# Altium PCB PCB2.PcbDoc (part 5 of 5)
Units mil, origin at the board's own origin, x right, y up, seen from the top; angles counter-clockwise.
Board outline 6000 x 4000 mil, 2 copper layers (Top Layer, Bottom Layer); 109 components, 117 nets, 490 pads, 96 vias.
Unrouted connection lines stored in the file: 3.
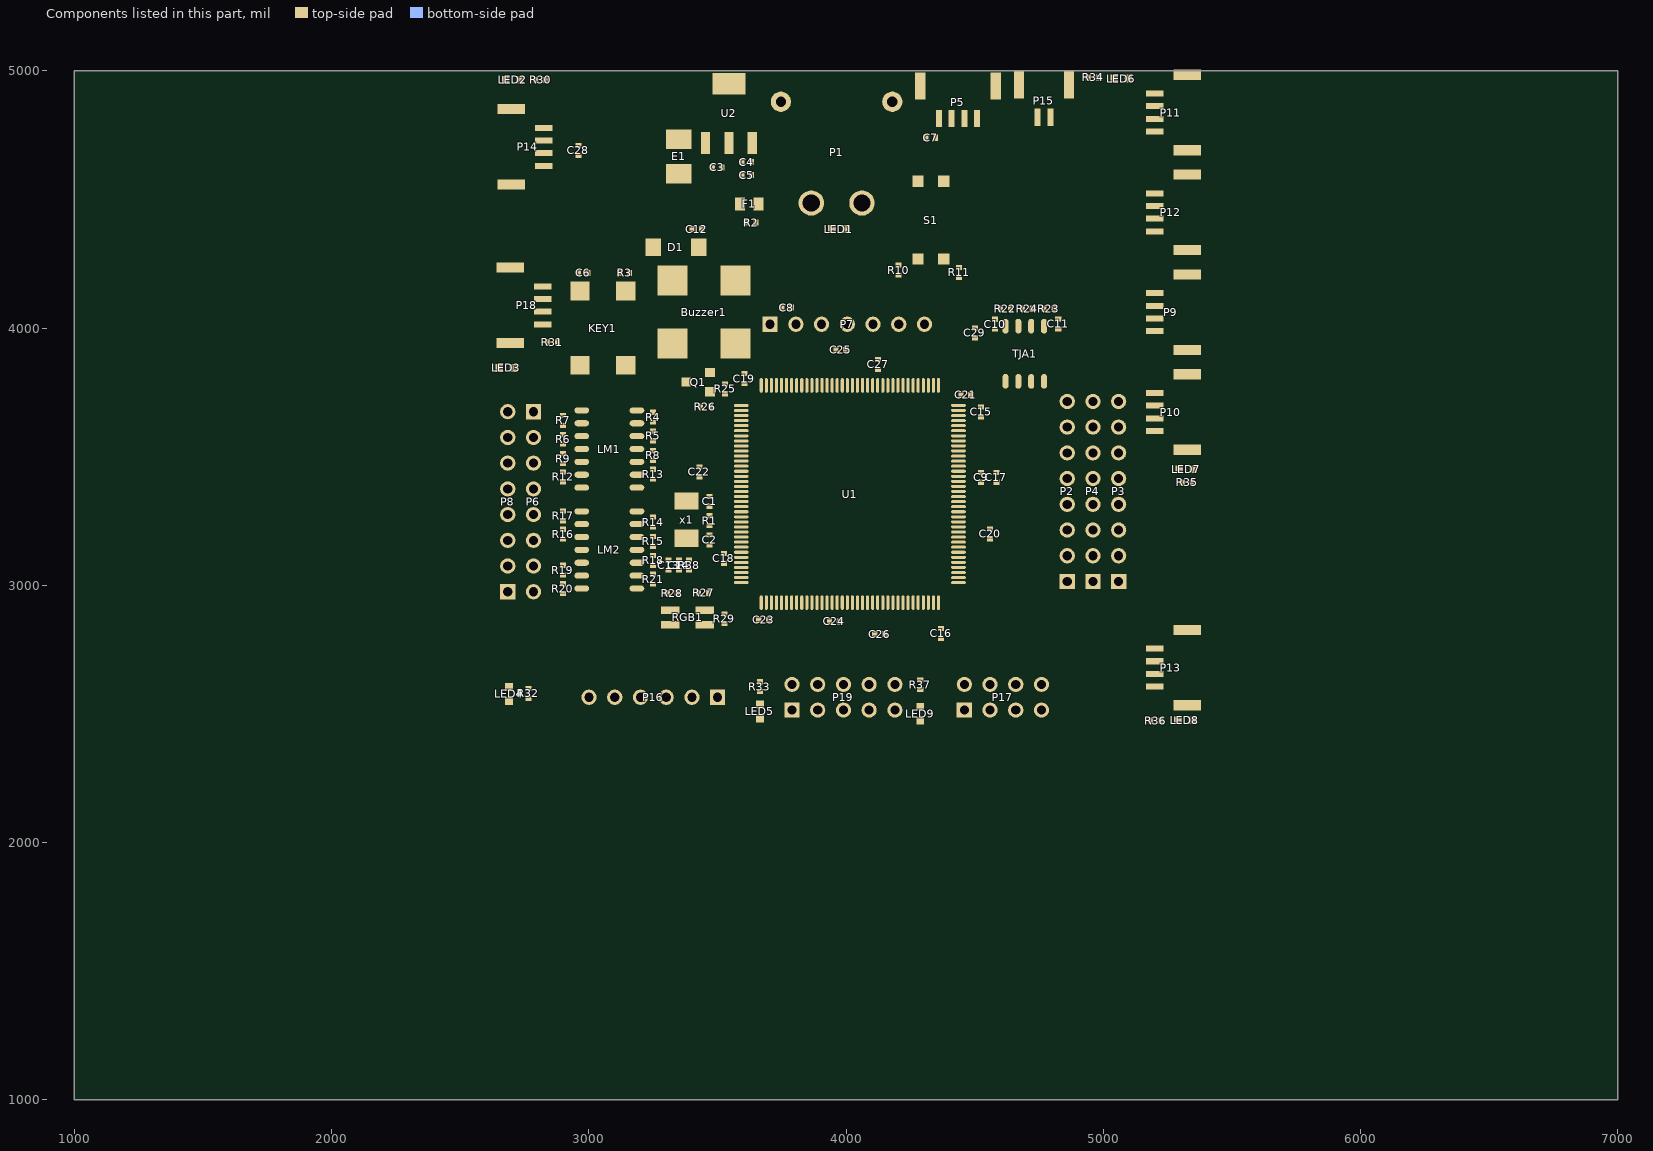
[diagram p5: the components of this part, seen from the top]

## Via types
v1: diameter 19.68, hole 11.81, Top Layer to Bottom Layer, tented both sides, 64 vias
v2: diameter 39, hole 30, Top Layer to Bottom Layer, tented both sides, 17 vias
v3: diameter 30, hole 20, Top Layer to Bottom Layer, tented both sides, 15 vias

## Nets (pads, with @x,y where several pads share a name; then routed paths per layer and width w, separated by ;. In a path a pad name is that pad's centre, name@x,y a point inside that pad or via, vN(x,y) a via of type N, cw(c..) or ccw(c..) an arc to the next point about the centre after c; other vN are vias at no path point) (continued)
copper on no net: (continued)
  Top Layer w1: 4407.33,2111 4493.67,2111 ; 4407.33,2112 4493.67,2112 ; 4407.33,2113 4493.67,2113 ; 4407.33,2114 4493.67,2114 ; 4407.33,2115 4493.67,2115 ; 4407.33,2116 4493.67,2116 ; 4407.33,2117 4492.67,2117 ; 4407.33,2118 4492.67,2118 ; 4408.33,2097 4495.67,2097 ; 4408.33,2098 4495.67,2098 ; 4408.33,2099 4494.67,2099 ; 4408.33,2100 4494.67,2100 ; 4408.33,2101 4494.67,2101 ; 4408.33,2102 4494.67,2102 ; 4408.33,2103 4494.67,2103 ; 4408.33,2104 4494.67,2104 ; 4408.33,2105 4494.67,2105 ; 4408.33,2106 4494.67,2106 ; 4408.33,2107 4494.67,2107 ; 4408.33,2108 4494.67,2108 ; 4408.33,2109 4494.67,2109 ; 4408.33,2272 4510.67,2272 ; 4409.33,1930 4423.67,1930 ; 4409.33,1931 4423.67,1931 ; 4409.33,1932 4423.67,1932 ; 4409.33,1933 4423.67,1933 ; 4409.33,1934 4423.67,1934 ; 4409.33,1935 4423.67,1935 ; 4409.33,1936 4423.67,1936 ; 4409.33,1937 4423.67,1937 ; 4409.33,1938 4423.67,1938 ; 4409.33,1939 4423.67,1939 ; 4409.33,1940 4423.67,1940 ; 4409.33,1941 4423.67,1941 ; 4409.33,1942 4423.67,1942 ; 4409.33,1943 4423.67,1943 ; 4409.33,1944 4423.67,1944 ; 4409.33,1945 4423.67,1945 ; 4409.33,1946 4423.67,1946 ; 4409.33,1947 4423.67,1947 ; 4409.33,1948 4423.67,1948 ; 4409.33,1949 4423.67,1949 ; 4409.33,1950 4423.67,1950 ; 4409.33,1951 4423.67,1951 ; 4409.33,1952 4423.67,1952 ; 4409.33,1953 4423.67,1953 ; 4409.33,1954 4423.67,1954 ; 4409.33,1955 4423.67,1955 ; 4409.33,1956 4423.67,1956 ; 4409.33,1957 4423.67,1957 ; 4409.33,1958 4423.67,1958 ; 4409.33,1959 4423.67,1959 ; 4409.33,1960 4423.67,1960 ; 4409.33,1961 4423.67,1961 ; 4409.33,1962 4447.67,1962 ; 4409.33,1963 4448.67,1963 ; 4409.33,1964 4448.67,1964 ; 4409.33,1965 4449.67,1965 ; 4409.33,1966 4449.67,1966 ; 4409.33,1967 4449.67,1967 ; 4409.33,1968 4423.67,1968 ; 4409.33,1969 4423.67,1969 ; 4409.33,1970 4423.67,1970 ; 4409.33,1971 4423.67,1971 ; 4409.33,1972 4423.67,1972 ; 4409.33,1973 4423.67,1973 ; 4409.33,1974 4423.67,1974 ; 4409.33,1975 4423.67,1975 ; 4409.33,1976 4423.67,1976 ; 4409.33,1977 4423.67,1977 ; 4409.33,1978 4423.67,1978 ; 4409.33,1979 4423.67,1979 ; 4409.33,1980 4423.67,1980 ; 4409.33,1981 4423.67,1981 ; 4409.33,1982 4423.67,1982 ; 4409.33,1983 4423.67,1983 ; 4409.33,1984 4423.67,1984 ; 4409.33,1985 4423.67,1985 ; 4409.33,1986 4423.67,1986 ; 4409.33,1987 4423.67,1987 ; 4409.33,1988 4423.67,1988 ; 4409.33,1989 4423.67,1989 ; 4409.33,1990 4423.67,1990 ; 4409.33,1991 4423.67,1991 ; 4409.33,1992 4423.67,1992 ; 4409.33,1993 4423.67,1993 ; 4409.33,1994 4423.67,1994 ; 4409.33,1995 4423.67,1995 ; 4409.33,1996 4423.67,1996 ; 4409.33,1997 4423.67,1997 ; 4409.33,1998 4423.67,1998 ; 4409.33,1999 4423.67,1999 ; 4409.33,2000 4423.67,2000 ; 4409.33,2001 4423.67,2001 ; 4409.33,2002 4423.67,2002 ; 4409.33,2003 4423.67,2003 ; 4409.33,2004 4423.67,2004 ; 4409.33,2005 4423.67,2005 ; 4409.33,2006 4423.67,2006 ; 4409.33,2007 4423.67,2007 ; 4409.33,2008 4423.67,2008 ; 4409.33,2009 4423.67,2009 ; 4409.33,2010 4423.67,2010 ; 4409.33,2011 4423.67,2011 ; 4409.33,2012 4423.67,2012 ; 4409.33,2013 4423.67,2013 ; 4409.33,2014 4423.67,2014 ; 4409.33,2015 4423.67,2015 ; 4409.33,2016 4423.67,2016 ; 4409.33,2017 4423.67,2017 ; 4409.33,2018 4423.67,2018 ; 4409.33,2019 4423.67,2019 ; 4409.33,2020 4423.67,2020 ; 4409.33,2021 4451.67,2021 ; 4409.33,2022 4453.67,2022 ; 4409.33,2023 4454.67,2023 ; 4409.33,2024 4455.67,2024 ; 4409.33,2025 4454.67,2025 ; 4409.33,2026 4453.67,2026 ; 4409.33,2027 4452.67,2027 ; 4409.33,2028 4451.67,2028 ; 4409.33,2029 4449.67,2029 ; 4409.33,2030 4448.67,2030 ; 4409.33,2031 4423.67,2031 ; 4409.33,2032 4423.67,2032 ; 4409.33,2033 4423.67,2033 ; 4409.33,2079 4494.67,2079 ; 4409.33,2080 4495.67,2080 ; 4409.33,2081 4495.67,2081 ; 4409.33,2082 4495.67,2082 ; 4409.33,2083 4495.67,2083 ; 4409.33,2084 4495.67,2084 ; 4409.33,2085 4495.67,2085 ; 4409.33,2086 4495.67,2086 ; 4409.33,2087 4495.67,2087 ; 4409.33,2088 4495.67,2088 ; 4409.33,2089 4495.67,2089 ; 4409.33,2090 4495.67,2090 ; 4409.33,2091 4495.67,2091 ; 4409.33,2092 4495.67,2092 ; 4409.33,2093 4495.67,2093 ; 4409.33,2094 4495.67,2094 ; 4409.33,2095 4495.67,2095 ; 4409.33,2096 4495.67,2096 ; 4409.33,2271 4510.67,2271 ; 4410.33,2064 4492.67,2064 ; 4410.33,2065 4492.67,2065 ; 4410.33,2066 4493.67,2066 ; 4410.33,2067 4493.67,2067 ; 4410.33,2068 4493.67,2068 ; 4410.33,2069 4493.67,2069 ; 4410.33,2070 4493.67,2070 ; 4410.33,2071 4494.67,2071 ; 4410.33,2072 4494.67,2072 ; 4410.33,2073 4494.67,2073 ; 4410.33,2074 4494.67,2074 ; 4410.33,2075 4494.67,2075 ; 4410.33,2076 4494.67,2076 ; 4410.33,2077 4494.67,2077 ; 4410.33,2078 4494.67,2078 ; 4411.33,2063 4491.67,2063 ; 4411.33,2270 4511.67,2270 ; 4412.33,2269 4511.67,2269 ; 4413.33,2268 4512.67,2268 ; 4414.33,2267 4512.67,2267 ; 4415.33,2266 4513.67,2266 ; 4416.33,2264 4514.67,2264 ; 4416.33,2265 4513.67,2265 ; 4417.33,2263 4514.67,2263 ; 4418.33,2261 4515.67,2261 ; 4418.33,2262 4515.67,2262 ; 4419.33,2260 4516.67,2260 ; 4420.33,2258 4516.67,2258 ; 4420.33,2259 4516.67,2259 ; 4421.33,2255 4517.67,2255 ; 4421.33,2256 4517.67,2256 ; 4421.33,2257 4517.67,2257 ; 4422.33,2253 4518.67,2253 ; 4422.33,2254 4518.67,2254 ; 4423.33,2251 4519.67,2251 ; 4423.33,2252 4519.67,2252 ; 4424.33,2249 4520.67,2249 ; 4424.33,2250 4519.67,2250 ; 4425.33,1961 4447.67,1961 ; 4425.33,2246 4521.67,2246 ; 4425.33,2247 4520.67,2247 ; 4425.33,2248 4520.67,2248 ; 4426.33,2242 4522.67,2242 ; 4426.33,2243 4522.67,2243 ; 4426.33,2244 4521.67,2244 ; 4426.33,2245 4521.67,2245 ; 4427.33,2237 4523.67,2237 ; 4427.33,2238 4523.67,2238 ; 4427.33,2239 4523.67,2239 ; 4427.33,2240 4523.67,2240 ; 4427.33,2241 4522.67,2241 ; 4428.33,1960 4446.67,1960 ; 4428.33,1995 4439.67,1995 ; 4428.33,1996 4438.67,1996 ; 4428.33,1997 4437.67,1997 ; 4428.33,1998 4437.67,1998 ; 4428.33,1999 4438.67,1999 ; 4428.33,2223 4526.67,2223 ; 4428.33,2229 4525.67,2229 ; 4428.33,2230 4525.67,2230 ; 4428.33,2231 4525.67,2231 ; 4428.33,2232 4525.67,2232 ; 4428.33,2233 4524.67,2233 ; 4428.33,2234 4524.67,2234 ; 4428.33,2235 4524.67,2235 ; 4428.33,2236 4524.67,2236 ; 4429.33,1968 4449.67,1968 ; 4429.33,1994 4440.67,1994 ; 4429.33,2000 4438.67,2000 ; 4429.33,2001 4439.67,2001 ; 4429.33,2002 4439.67,2002 ; 4429.33,2003 4440.67,2003 ; 4429.33,2224 4526.67,2224 ; 4429.33,2225 4526.67,2225 ; 4429.33,2226 4526.67,2226 ; 4429.33,2227 4526.67,2227 ; 4429.33,2228 4525.67,2228 ; 4430.33,1959 4445.67,1959 ; 4430.33,1992 4442.67,1992 ; 4430.33,1993 4441.67,1993 ; 4430.33,2004 4440.67,2004 ; 4430.33,2005 4441.67,2005 ; 4430.33,2006 4441.67,2006 ; 4430.33,2007 4442.67,2007 ; 4431.33,1957 4443.67,1957 ; 4431.33,1958 4444.67,1958 ; 4431.33,1990 4444.67,1990 ; 4431.33,1991 4443.67,1991 ; 4431.33,2008 4442.67,2008 ; 4431.33,2009 4443.67,2009 ; 4431.33,2010 4443.67,2010 ; 4431.33,2011 4444.67,2011 ; 4432.33,1955 4438.67,1955 ; 4432.33,1956 4441.67,1956 ; 4432.33,1989 4445.67,1989 ; 4432.33,2012 4444.67,2012 ; 4432.33,2013 4445.67,2013 ; 4432.33,2014 4446.67,2014 ; 4433.33,1954 4433.67,1954 ; 4433.33,1986 4447.67,1986 ; 4433.33,1987 4446.67,1987 ; 4433.33,1988 4446.67,1988 ; 4433.33,2015 4446.67,2015 ; 4433.33,2016 4447.67,2016 ; 4433.33,2017 4447.67,2017 ; 4433.33,2018 4448.67,2018 ; 4434.33,1969 4450.67,1969 ; 4434.33,1984 4448.67,1984 ; 4434.33,1985 4447.67,1985 ; 4434.33,2019 4449.67,2019 ; 4434.33,2020 4450.67,2020 ; 4435.33,1970 4450.67,1970 ; 4435.33,1981 4449.67,1981 ; 4435.33,1982 4449.67,1982 ; 4435.33,1983 4448.67,1983 ; 4436.33,1934 4448.67,1934 ; 4436.33,1935 4449.67,1935 ; 4436.33,1936 4451.67,1936 ; 4436.33,1971 4450.67,1971 ; 4436.33,1972 4450.67,1972 ; 4436.33,1973 4450.67,1973 ; 4436.33,1974 4450.67,1974 ; 4436.33,1975 4450.67,1975 ; 4436.33,1976 4450.67,1976 ; 4436.33,1977 4450.67,1977 ; 4436.33,1978 4450.67,1978 ; 4436.33,1979 4449.67,1979 ; 4436.33,1980 4449.67,1980 ; 4436.33,2031 4446.67,2031 ; 4437.33,1933 4447.67,1933 ; 4437.33,1937 4452.67,1937 ; 4437.33,2032 4445.67,2032 ; 4438.33,1932 4445.67,1932 ; 4438.33,1938 4453.67,1938 ; 4438.33,2033 4443.67,2033 ; 4438.33,2034 4442.67,2034 ; 4439.33,1931 4444.67,1931 ; 4439.33,1939 4454.67,1939 ; 4439.33,2035 4440.67,2035 ; 4440.33,1930 4442.67,1930 ; 4440.33,1940 4455.67,1940 ; 4441.33,1929 4441.67,1929 ; 4441.33,1941 4456.67,1941 ; 4442.33,1942 4458.67,1942 ; 4443.33,1943 4459.67,1943 ; 4444.33,1944 4460.67,1944 ; 4445.33,1945 4461.67,1945 ; 4445.33,1946 4461.67,1946 ; 4446.33,1947 4462.67,1947 ; 4447.33,1948 4463.67,1948 ; 4448.33,1949 4464.67,1949 ; 4448.33,1950 4465.67,1950 ; 4449.33,1951 4466.67,1951 ; 4450.33,1952 4466.67,1952 ; 4450.33,1953 4467.67,1953 ; 4451.33,1954 4468.67,1954 ; 4452.33,1955 4469.67,1955 ; 4452.33,1956 4469.67,1956 ; 4453.33,1957 4470.67,1957 ; 4454.33,1958 4470.67,1958 ; 4454.33,1959 4471.67,1959 ; 4455.33,1960 4472.67,1960 ; 4455.33,1961 4472.67,1961 ; 4456.33,1962 4473.67,1962 ; 4456.33,1963 4473.67,1963 ; 4457.33,1964 4473.67,1964 ; 4457.33,1965 4474.67,1965 ; 4458.33,1966 4474.67,1966 ; 4458.33,1967 4491.67,1967 ; 4459.33,1968 4491.67,1968 ; 4459.33,1969 4490.67,1969 ; 4459.33,1970 4489.67,1970 ; 4460.33,1971 4489.67,1971 ; 4460.33,1972 4488.67,1972 ; 4461.33,1973 4488.67,1973 ; 4461.33,1974 4487.67,1974 ; 4461.33,1975 4486.67,1975 ; 4461.33,1976 4486.67,1976 ; 4462.33,1977 4485.67,1977 ; 4462.33,1978 4485.67,1978 ; 4462.33,1979 4484.67,1979 ; 4463.33,1980 4484.67,1980 ; 4463.33,1981 4483.67,1981 ; 4463.33,1982 4483.67,1982 ; 4463.33,1983 4483.67,1983 ; 4463.33,1984 4482.67,1984 ; 4464.33,1985 4482.67,1985 ; 4464.33,1986 4481.67,1986 ; 4464.33,1987 4481.67,1987 ; 4464.33,1988 4481.67,1988 ; 4464.33,1989 4480.67,1989 ; 4464.33,1990 4480.67,1990 ; 4464.33,1991 4480.67,1991 ; 4465.33,1992 4480.67,1992 ; 4465.33,1993 4480.67,1993 ; 4465.33,1994 4480.67,1994 ; 4465.33,1995 4480.67,1995 ; 4465.33,1996 4480.67,1996 ; 4465.33,1997 4480.67,1997 ; 4465.33,1998 4480.67,1998 ; 4465.33,1999 4480.67,1999 ; 4465.33,2000 4480.67,2000 ; 4465.33,2001 4480.67,2001 ; 4465.33,2002 4480.67,2002 ; 4465.33,2003 4480.67,2003 ; 4465.33,2004 4480.67,2004 ; 4465.33,2005 4480.67,2005 ; 4465.33,2006 4480.67,2006 ; 4465.33,2007 4480.67,2007 ; 4465.33,2008 4480.67,2008 ; 4465.33,2009 4480.67,2009 ; 4465.33,2010 4480.67,2010 ; 4465.33,2011 4480.67,2011 ; 4465.33,2012 4480.67,2012 ; 4465.33,2013 4480.67,2013 ; 4465.33,2014 4480.67,2014 ; 4465.33,2015 4480.67,2015 ; 4465.33,2016 4480.67,2016 ; 4465.33,2017 4480.67,2017 ; 4465.33,2018 4480.67,2018 ; 4465.33,2019 4480.67,2019 ; 4465.33,2020 4480.67,2020 ; 4465.33,2021 4480.67,2021 ; 4465.33,2022 4480.67,2022 ; 4465.33,2023 4480.67,2023 ; 4465.33,2024 4480.67,2024 ; 4465.33,2025 4480.67,2025 ; 4465.33,2026 4480.67,2026 ; 4465.33,2027 4480.67,2027 ; 4465.33,2028 4480.67,2028 ; 4465.33,2029 4480.67,2029 ; 4465.33,2030 4480.67,2030 ; 4465.33,2031 4480.67,2031 ; 4465.33,2032 4480.67,2032 ; 4465.33,2033 4480.67,2033 ; 4465.33,2034 4480.67,2034 ; 4465.33,2035 4480.67,2035 ; 4476.33,1966 4492.67,1966 ; 4477.33,1963 4494.67,1963 ; 4477.33,1964 4493.67,1964 ; 4477.33,1965 4493.67,1965 ; 4478.33,1961 4496.67,1961 ; 4478.33,1962 4495.67,1962 ; 4479.33,1958 4498.67,1958 ; 4479.33,1959 4497.67,1959 ; 4479.33,1960 4496.67,1960 ; 4480.33,1956 4500.67,1956 ; 4480.33,1957 4499.67,1957 ; 4481.33,1954 4502.67,1954 ; 4481.33,1955 4501.67,1955 ; 4482.33,1952 4504.67,1952 ; 4482.33,1953 4503.67,1953 ; 4483.33,1950 4506.67,1950 ; 4483.33,1951 4505.67,1951 ; 4484.33,1948 4508.67,1948 ; 4484.33,1949 4507.67,1949 ; 4485.33,1946 4511.67,1946 ; 4485.33,1947 4510.67,1947 ; 4486.33,1944 4509.67,1944 ; 4486.33,1945 4510.67,1945 ; 4487.33,1943 4508.67,1943 ; 4488.33,1941 4505.67,1941 ; 4488.33,1942 4507.67,1942 ; 4489.33,1939 4503.67,1939 ; 4489.33,1940 4504.67,1940 ; 4490.33,1938 4502.67,1938 ; 4491.33,1937 4501.67,1937 ; 4492.33,1935 4500.67,1935 ; 4492.33,1936 4500.67,1936 ; 4493.33,1934 4499.67,1934 ; 4494.33,1933 4498.67,1933 ; 4495.33,1931 4496.67,1931 ; 4495.33,1932 4497.67,1932 ; 4496.33,1930 4496.67,1930 ; 4534.33,2370 4582.67,2370 ; 4534.33,2371 4582.67,2371 ; 4534.33,2372 4582.67,2372 ; 4534.33,2373 4582.67,2373 ; 4534.33,2374 4582.67,2374 ; 4534.33,2375 4582.67,2375 ; 4534.33,2376 4582.67,2376 ; 4534.33,2377 4582.67,2377 ; 4534.33,2378 4582.67,2378 ; 4534.33,2379 4582.67,2379 ; 4534.33,2380 4582.67,2380 ; 4552.33,2319 4564.67,2319 ; 4552.33,2320 4564.67,2320 ; 4552.33,2321 4564.67,2321 ; 4552.33,2322 4564.67,2322 ; 4552.33,2323 4564.67,2323 ; 4552.33,2324 4564.67,2324 ; 4552.33,2325 4564.67,2325 ; 4552.33,2326 4564.67,2326 ; 4552.33,2327 4564.67,2327 ; 4552.33,2328 4564.67,2328 ; 4552.33,2329 4564.67,2329 ; 4552.33,2330 4564.67,2330 ; 4552.33,2331 4564.67,2331 ; 4552.33,2332 4564.67,2332 ; 4552.33,2333 4564.67,2333 ; 4552.33,2334 4564.67,2334 ; 4552.33,2335 4564.67,2335 ; 4552.33,2336 4564.67,2336 ; 4552.33,2337 4564.67,2337 ; 4552.33,2338 4564.67,2338 ; 4552.33,2339 4564.67,2339 ; 4552.33,2340 4564.67,2340 ; 4552.33,2341 4564.67,2341 ; 4552.33,2342 4564.67,2342 ; 4552.33,2343 4564.67,2343 ; 4552.33,2344 4564.67,2344 ; 4552.33,2345 4564.67,2345 ; 4552.33,2346 4564.67,2346 ; 4552.33,2347 4564.67,2347 ; 4552.33,2348 4564.67,2348 ; 4552.33,2349 4564.67,2349 ; 4552.33,2350 4564.67,2350 ; 4552.33,2351 4564.67,2351 ; 4552.33,2352 4564.67,2352 ; 4552.33,2353 4564.67,2353 ; 4552.33,2354 4564.67,2354 ; 4552.33,2355 4564.67,2355 ; 4552.33,2356 4564.67,2356 ; 4552.33,2357 4564.67,2357 ; 4552.33,2358 4564.67,2358 ; 4552.33,2359 4564.67,2359 ; 4552.33,2360 4564.67,2360 ; 4552.33,2361 4564.67,2361 ; 4552.33,2362 4564.67,2362 ; 4552.33,2363 4564.67,2363 ; 4552.33,2364 4564.67,2364 ; 4552.33,2365 4564.67,2365 ; 4552.33,2366 4564.67,2366 ; 4552.33,2367 4564.67,2367 ; 4552.33,2368 4564.67,2368 ; 4552.33,2369 4564.67,2369 ; 4587.33,2319 4599.67,2319 ; 4587.33,2320 4599.67,2320 ; 4587.33,2321 4599.67,2321 ; 4587.33,2322 4599.67,2322 ; 4587.33,2323 4599.67,2323 ; 4588.33,2324 4600.67,2324 ; 4588.33,2325 4600.67,2325 ; 4588.33,2326 4600.67,2326 ; 4588.33,2327 4600.67,2327 ; 4588.33,2328 4600.67,2328 ; 4588.33,2329 4600.67,2329 ; 4588.33,2330 4600.67,2330 ; 4588.33,2331 4600.67,2331 ; 4588.33,2332 4600.67,2332 ; 4588.33,2333 4600.67,2333 ; 4588.33,2334 4600.67,2334 ; 4588.33,2335 4600.67,2335 ; 4588.33,2336 4600.67,2336 ; 4588.33,2337 4600.67,2337 ; 4588.33,2338 4600.67,2338 ; 4589.33,2339 4600.67,2339 ; 4589.33,2340 4600.67,2340 ; 4589.33,2341 4601.67,2341 ; 4589.33,2342 4601.67,2342 ; 4589.33,2343 4601.67,2343 ; 4589.33,2344 4601.67,2344 ; 4589.33,2345 4601.67,2345 ; 4589.33,2346 4601.67,2346 ; 4589.33,2347 4601.67,2347 ; 4589.33,2348 4601.67,2348 ; 4589.33,2349 4601.67,2349 ; 4589.33,2350 4601.67,2350 ; 4589.33,2351 4601.67,2351 ; 4589.33,2352 4601.67,2352 ; 4589.33,2353 4601.67,2353 ; 4589.33,2354 4601.67,2354 ; 4590.33,2355 4601.67,2355 ; 4590.33,2356 4601.67,2356 ; 4590.33,2357 4601.67,2357 ; 4590.33,2358 4601.67,2358 ; 4590.33,2359 4601.67,2359 ; 4590.33,2360 4601.67,2360 ; 4590.33,2361 4601.67,2361 ; 4590.33,2362 4601.67,2362 ; 4590.33,2363 4601.67,2363 ; 4590.33,2364 4602.67,2364 ; 4590.33,2365 4602.67,2365 ; 4590.33,2366 4602.67,2366 ; 4590.33,2367 4602.67,2367 ; 4590.33,2368 4602.67,2368 ; 4590.33,2369 4602.67,2369 ; 4591.33,2370 4602.67,2370 ; 4591.33,2371 4602.67,2371 ; 4591.33,2372 4614.67,2372 ; 4591.33,2373 4614.67,2373 ; 4591.33,2374 4613.67,2374 ; 4591.33,2375 4613.67,2375 ; 4591.33,2376 4613.67,2376 ; 4591.33,2377 4612.67,2377 ; 4591.33,2378 4612.67,2378 ; 4591.33,2379 4612.67,2379 ; 4591.33,2380 4611.67,2380 ; 4604.33,2367 4616.67,2367 ; 4604.33,2368 4615.67,2368 ; 4604.33,2369 4615.67,2369 ; 4604.33,2370 4615.67,2370 ; 4604.33,2371 4614.67,2371 ; 4605.33,2362 4617.67,2362 ; 4605.33,2363 4617.67,2363 ; 4605.33,2364 4616.67,2364 ; 4605.33,2365 4616.67,2365 ; 4605.33,2366 4616.67,2366 ; 4606.33,2357 4619.67,2357 ; 4606.33,2358 4618.67,2358 ; 4606.33,2359 4618.67,2359 ; 4606.33,2360 4618.67,2360 ; 4606.33,2361 4617.67,2361 ; 4607.33,2353 4620.67,2353 ; 4607.33,2354 4620.67,2354 ; 4607.33,2355 4619.67,2355 ; 4607.33,2356 4619.67,2356 ; 4608.33,2349 4621.67,2349 ; 4608.33,2350 4621.67,2350 ; 4608.33,2351 4620.67,2351 ; 4608.33,2352 4620.67,2352 ; 4609.33,2345 4622.67,2345 ; 4609.33,2346 4621.67,2346 ; 4609.33,2347 4621.67,2347 ; 4609.33,2348 4621.67,2348 ; 4610.33,2342 4622.67,2342 ; 4610.33,2343 4622.67,2343 ; 4610.33,2344 4622.67,2344 ; 4611.33,2338 4634.67,2338 ; 4611.33,2339 4623.67,2339 ; 4611.33,2340 4623.67,2340 ; 4611.33,2341 4623.67,2341 ; 4612.33,2334 4633.67,2334 ; 4612.33,2335 4634.67,2335 ; 4612.33,2336 4634.67,2336 ; 4612.33,2337 4634.67,2337 ; 4613.33,2331 4632.67,2331 ; 4613.33,2332 4633.67,2332 ; 4613.33,2333 4633.67,2333 ; 4614.33,2327 4631.67,2327 ; 4614.33,2328 4632.67,2328 ; 4614.33,2329 4632.67,2329 ; 4614.33,2330 4632.67,2330 ; 4615.33,2323 4630.67,2323 ; 4615.33,2324 4630.67,2324 ; 4615.33,2325 4631.67,2325 ; 4615.33,2326 4631.67,2326 ; 4616.33,2320 4629.67,2320 ; 4616.33,2321 4630.67,2321 ; 4616.33,2322 4630.67,2322 ; 4625.33,2339 4635.67,2339 ; 4625.33,2340 4635.67,2340 ; 4625.33,2341 4635.67,2341 ; 4625.33,2342 4636.67,2342 ; 4626.33,2343 4636.67,2343 ; 4626.33,2344 4636.67,2344 ; 4626.33,2345 4636.67,2345 ; 4626.33,2346 4637.67,2346 ; 4627.33,2347 4637.67,2347 ; 4627.33,2348 4637.67,2348 ; 4627.33,2349 4638.67,2349 ; 4627.33,2350 4638.67,2350 ; 4628.33,2351 4638.67,2351 ; 4628.33,2352 4638.67,2352 ; 4628.33,2353 4639.67,2353 ; 4628.33,2354 4639.67,2354 ; 4629.33,2355 4639.67,2355 ; 4629.33,2356 4639.67,2356 ; 4629.33,2357 4640.67,2357 ; 4630.33,2358 4640.67,2358 ; 4630.33,2359 4640.67,2359 ; 4630.33,2360 4641.67,2360 ; 4630.33,2361 4641.67,2361 ; 4631.33,2362 4641.67,2362 ; 4631.33,2363 4641.67,2363 ; 4631.33,2364 4641.67,2364 ; 4632.33,2365 4642.67,2365 ; 4632.33,2366 4642.67,2366 ; 4632.33,2367 4642.67,2367 ; 4633.33,2368 4642.67,2368 ; 4633.33,2369 4643.67,2369 ; 4633.33,2370 4643.67,2370 ; 4634.33,2371 4643.67,2371 ; 4634.33,2372 4656.67,2372 ; 4634.33,2373 4656.67,2373 ; 4635.33,2374 4656.67,2374 ; 4635.33,2375 4656.67,2375 ; 4635.33,2376 4656.67,2376 ; 4636.33,2377 4656.67,2377 ; 4636.33,2378 4656.67,2378 ; 4636.33,2379 4656.67,2379 ; 4637.33,2380 4656.67,2380 ; 4645.33,2356 4657.67,2356 ; 4645.33,2357 4657.67,2357 ; 4645.33,2358 4657.67,2358 ; 4645.33,2359 4657.67,2359 ; 4645.33,2360 4657.67,2360 ; 4645.33,2361 4657.67,2361 ; 4645.33,2362 4657.67,2362 ; 4645.33,2363 4657.67,2363 ; 4645.33,2364 4657.67,2364 ; 4645.33,2365 4657.67,2365 ; 4645.33,2366 4657.67,2366 ; 4645.33,2367 4657.67,2367 ; 4645.33,2368 4657.67,2368 ; 4645.33,2369 4657.67,2369 ; 4645.33,2370 4656.67,2370 ; 4645.33,2371 4656.67,2371 ; 4646.33,2336 4659.67,2336 ; 4646.33,2337 4659.67,2337 ; 4646.33,2338 4659.67,2338 ; 4646.33,2339 4658.67,2339 ; 4646.33,2340 4658.67,2340 ; 4646.33,2341 4658.67,2341 ; 4646.33,2342 4658.67,2342 ; 4646.33,2343 4658.67,2343 ; 4646.33,2344 4658.67,2344 ; 4646.33,2345 4658.67,2345 ; 4646.33,2346 4658.67,2346 ; 4646.33,2347 4658.67,2347 ; 4646.33,2348 4658.67,2348 ; 4646.33,2349 4658.67,2349 ; 4646.33,2350 4658.67,2350 ; 4646.33,2351 4658.67,2351 ; 4646.33,2352 4658.67,2352 ; 4646.33,2353 4658.67,2353 ; 4646.33,2354 4658.67,2354 ; 4646.33,2355 4657.67,2355 ; 4647.33,2319 4660.67,2319 ; 4647.33,2320 4660.67,2320 ; 4647.33,2321 4660.67,2321 ; 4647.33,2322 4660.67,2322 ; 4647.33,2323 4660.67,2323 ; 4647.33,2324 4659.67,2324 ; 4647.33,2325 4659.67,2325 ; 4647.33,2326 4659.67,2326 ; 4647.33,2327 4659.67,2327 ; 4647.33,2328 4659.67,2328 ; 4647.33,2329 4659.67,2329 ; 4647.33,2330 4659.67,2330 ; 4647.33,2331 4659.67,2331 ; 4647.33,2332 4659.67,2332 ; 4647.33,2333 4659.67,2333 ; 4647.33,2334 4659.67,2334 ; 4647.33,2335 4659.67,2335
  other v1: 4490,2887.64
  other v2: 3805,5052.72

## Text inside footprints (layer, text, board x,y; h text height)
P17: Top Overlay "2" at 4360,2595 h50; Top Overlay "1" at 4380,2495 h50; Top Overlay "7" at 4820,2495 h50; Top Overlay "8" at 4820,2595 h50
P19: Top Overlay "10" at 4136.85,2595 h50; Top Overlay "9" at 4250,2495 h50; Top Overlay "1" at 3710,2495 h50; Top Overlay "2" at 3690,2595 h50
RGB1: Top Overlay "B" at 3362.21,2896.46 h19.68; Top Overlay "G" at 3392.21,2896.46 h19.68; Top Overlay "R" at 3392.21,2836.46 h19.68